# Altium PCB PCB1.PcbDoc
Units mm, origin at the board's own origin, x right, y up, seen from the top; angles counter-clockwise.
Board outline 61 x 30 mm, 2 copper layers (Top Layer, Bottom Layer); 4 components, 2 nets, 12 pads, 146 vias.
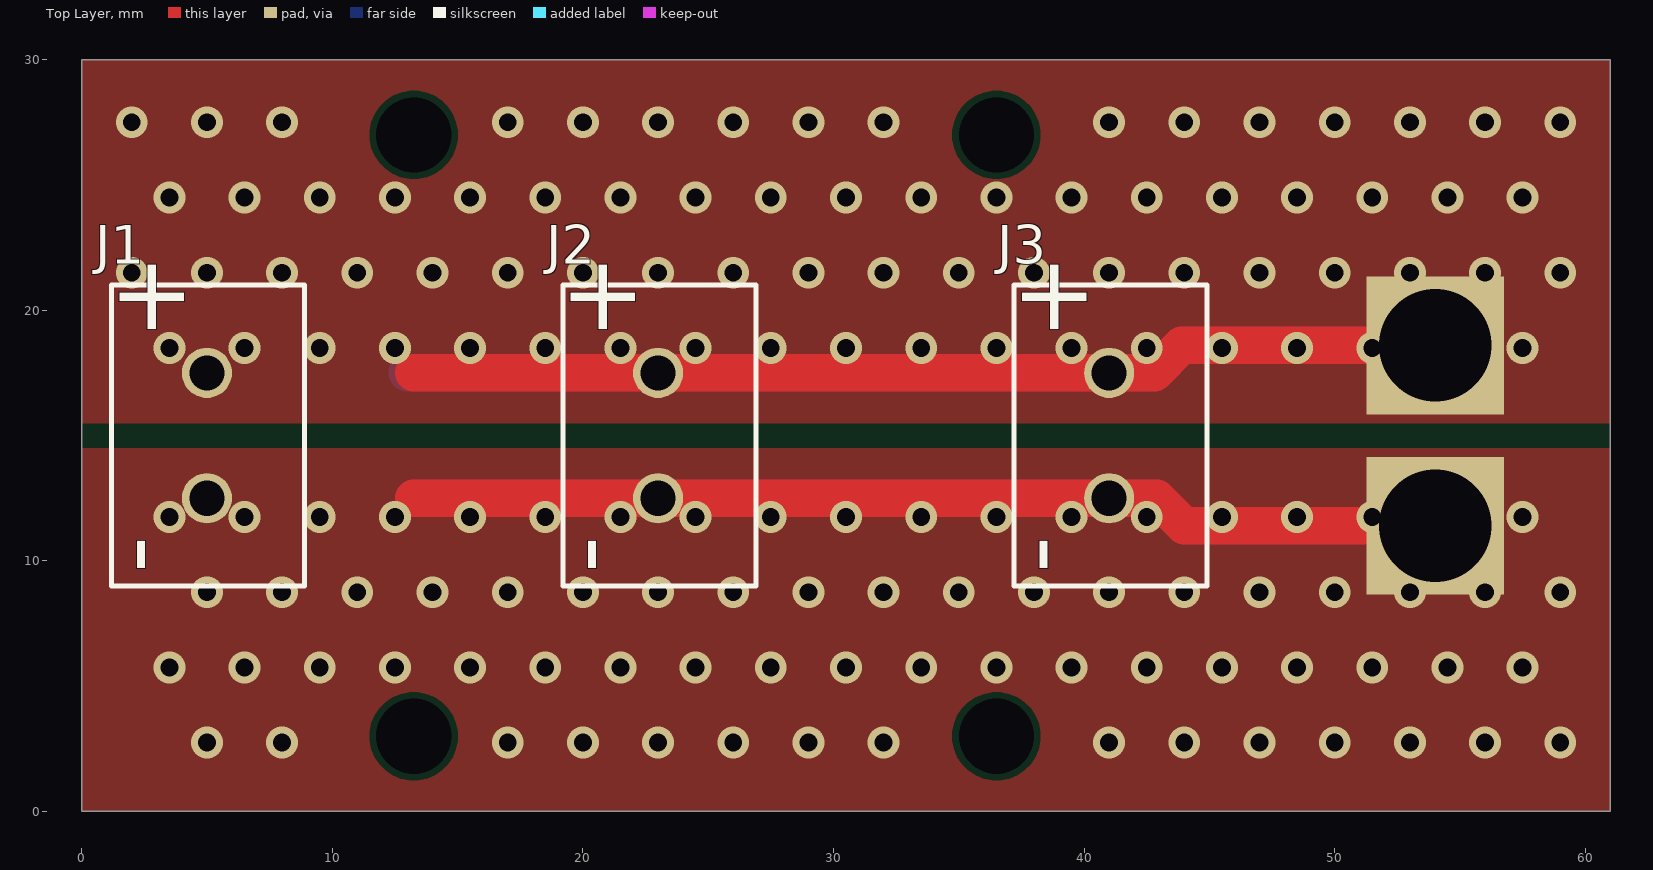
[diagram p0: Top Layer view]
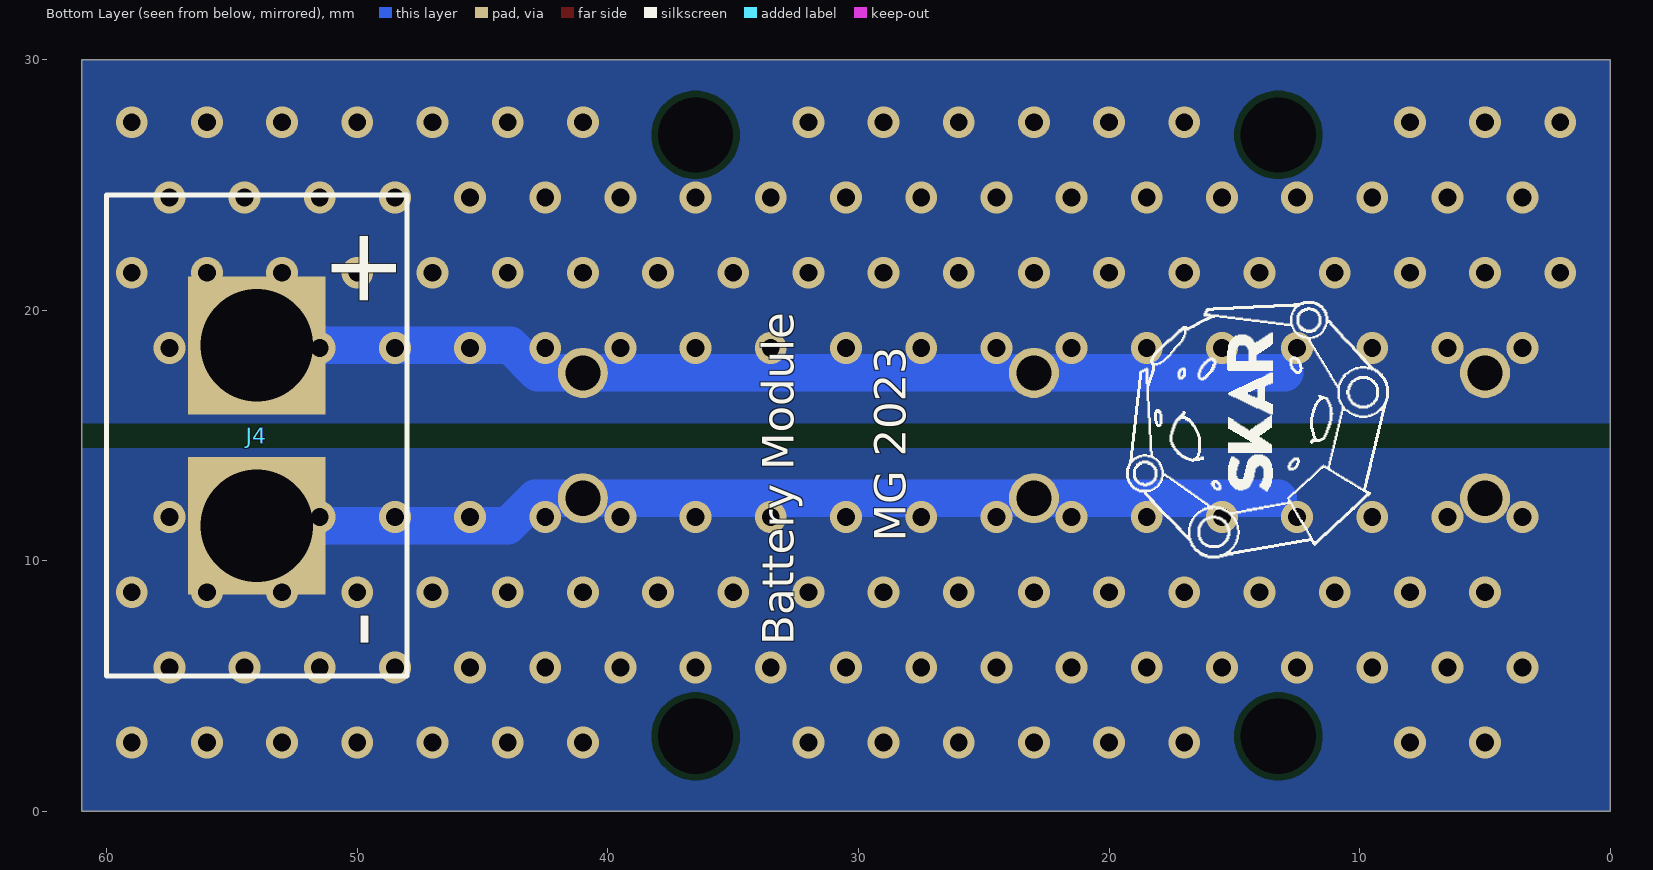
[diagram p1: Bottom Layer view, seen from below]
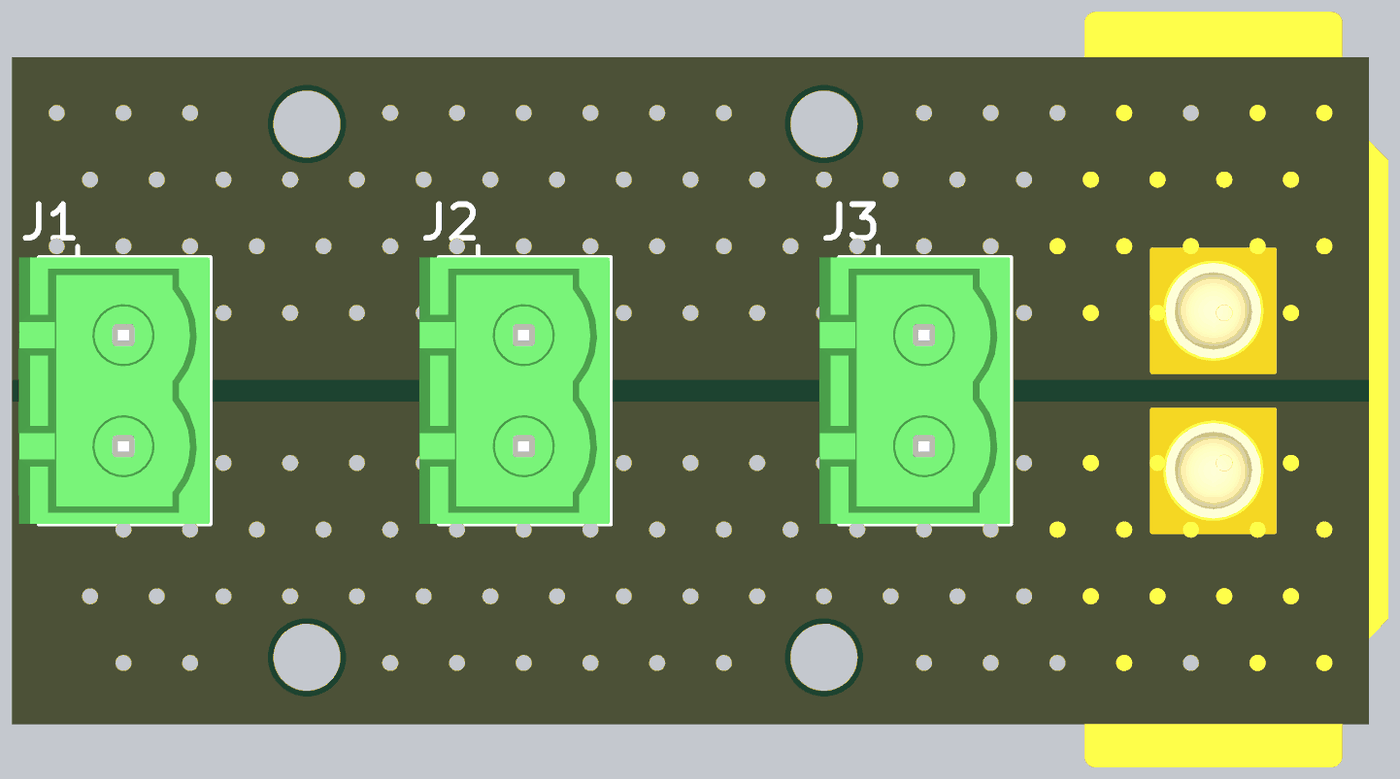
[diagram p2: 3D render of the assembled board from above, using the file's embedded part models]

## Layer stack, top to bottom
Top Solder: solder mask 0.0102, Solder Resist, Dk 3.5
Top Layer: signal copper 0.0356
Dielectric 1: dielectric 0.32, FR-4, Dk 4.8
Bottom Layer: signal copper 0.0356
Bottom Solder: solder mask 0.0102, Solder Resist, Dk 3.5

## Board outline
0,0 0,30 61,30 61,0

## Design rules (kind name [scope] priority, off if disabled: settings)
Clearance [All] p1: gap=0.254 ignorepadtopadclearanceinfootprint=FALSE except(0: Arc-Hole Track-Hole SMDPad-Hole THPad-Hole Via-Hole Fill-Hole Poly-Hole Region-Hole Text-Hole)
PolygonConnect [All] p1: connectstyle=Direct reliefconductorwidth=0.254 reliefentries=4 polygonreliefangle="90 Angle" airgapwidth=0.254
RoutingVias [All] p1: holewidth=0.711 width=1.27 viastyle="Through Hole" minholewidth=0.711 minwidth=1.27 maxholewidth=0.711 maxwidth=1.27
SolderMaskExpansion [All] p1: expansion=0.102 istentingtop=FALSE
Width [All] p1: maxlimit=1.5 minlimit=0.254 preferedwidth=1.5 minimp=50.000000 maximp=50.000000 favimp=50.000000
30 further rules are at their usual default settings.

## Components (designator, comment, footprint, x,y, rotation, side; value= is the part's Value field where it differs from the comment)
J1 "Connector_2" PCBComponent_1 5,17.5 r90 top
J2 "Connector_2" PCBComponent_1 23,17.5 r90 top
J3 "Connector_2" PCBComponent_1 41,17.5 r90 top
J4 "Connector_2" XT60_FEMALE_PANEL 54.012,18.6 r270 bottom

## Footprints (in the part's own frame and the unit in brackets; to place one, negate y for a bottom-side part, rotate by r counter-clockwise, add the part's x,y. Pads: shape width x height; smd on the part's side, far side on the other; paste and mask are expansions set on the pad)
PCBComponent_1 [mm]
  round 2 hole 1.4 paste-2539.97: 1(0,0) 2(-5,0)
  silkscreen extent -8.5,-3.9 3.5,3.8, body extent -8.5,-3.87 3.5,4.7, height 12.1
XT60_FEMALE_PANEL [mm]
  rect 5.5x5.5 hole 4.5 paste-2539.97: 1(0,0) 2(7.2,0)
  silkscreen extent -6,-6 13.2,6, body extent -13.45,-7.88 20.55,7.88, height 15.5

## Free pads (board coordinates)
  round 0 hole 3 paste-2539.97: 5(36.5,27) 6(13.25,27) 7(36.5,3) 8(13.25,3)

## Via types
v1: diameter 1.27, hole 0.711, Top Layer to Bottom Layer, tented both sides, 146 vias

## Nets (pads, with @x,y where several pads share a name; then routed paths per layer and width w, separated by ;. In a path a pad name is that pad's centre, name@x,y a point inside that pad or via, vN(x,y) a via of type N, cw(c..) or ccw(c..) an arc to the next point about the centre after c; other vN are vias at no path point)
+: J1.1 J2.1 J3.1 J4.1 | length 82.7
  Top Layer w1.5: 13.25,17.5 25.25,17.5 36.5,17.5 J3.1 42.8,17.5 43.9,18.6 J4.1@54,18.6
  Bottom Layer w1.5: 13,17.5 25,17.5 J3.1 42.8,17.5 43.9,18.6 J4.1@54,18.6
  other v1: 3.5,18.5 6.5,18.5 9.5,18.5 12.5,18.5 15.5,18.5 18.5,18.5 21.5,18.5 24.5,18.5 27.5,18.5 30.5,18.5 33.5,18.5 36.5,18.5 39.5,18.5 42.5,18.5 45.5,18.5 48.5,18.5 51.5,18.5 54.5,18.5 57.5,18.5 2,21.5 5,21.5 8,21.5 11,21.5 14,21.5 17,21.5 20,21.5 23,21.5 26,21.5 29,21.5 32,21.5 35,21.5 38,21.5 41,21.5 44,21.5 47,21.5 50,21.5 53,21.5 56,21.5 59,21.5 3.5,24.5 6.5,24.5 9.5,24.5 12.5,24.5 15.5,24.5 18.5,24.5 21.5,24.5 24.5,24.5 27.5,24.5 30.5,24.5 33.5,24.5 36.5,24.5 39.5,24.5 42.5,24.5 45.5,24.5 48.5,24.5 51.5,24.5 54.5,24.5 57.5,24.5 2,27.5 5,27.5 8,27.5 17,27.5 20,27.5 23,27.5 26,27.5 29,27.5 32,27.5 41,27.5 44,27.5 47,27.5 50,27.5 53,27.5 56,27.5 59,27.5
-: J1.2 J2.2 J3.2 J4.2 | length 82.4
  Top Layer w1.5: 13.25,12.5 25.25,12.5 36.5,12.5 J3.2 42.9,12.5 44,11.4 J4.2@54,11.4
  Bottom Layer w1.5: 13.25,12.5 25.25,12.5 36.5,12.5 J3.2 42.9,12.5 44,11.4 J4.2@54,11.4
  other v1: 5,2.75 8,2.75 17,2.75 20,2.75 23,2.75 26,2.75 29,2.75 32,2.75 41,2.75 44,2.75 47,2.75 50,2.75 53,2.75 56,2.75 59,2.75 3.5,5.75 6.5,5.75 9.5,5.75 12.5,5.75 15.5,5.75 18.5,5.75 21.5,5.75 24.5,5.75 27.5,5.75 30.5,5.75 33.5,5.75 36.5,5.75 39.5,5.75 42.5,5.75 45.5,5.75 48.5,5.75 51.5,5.75 54.5,5.75 57.5,5.75 5,8.75 8,8.75 11,8.75 14,8.75 17,8.75 20,8.75 23,8.75 26,8.75 29,8.75 32,8.75 35,8.75 38,8.75 41,8.75 44,8.75 47,8.75 50,8.75 53,8.75 56,8.75 59,8.75 3.5,11.75 6.5,11.75 9.5,11.75 12.5,11.75 15.5,11.75 18.5,11.75 21.5,11.75 24.5,11.75 27.5,11.75 30.5,11.75 33.5,11.75 36.5,11.75 39.5,11.75 42.5,11.75 45.5,11.75 48.5,11.75 51.5,11.75 54.5,11.75 57.5,11.75

## Polygon pours and split planes (outlines as drawn)
+ on Top Layer "+_L01_P000" (solid, pour order 0): 0,15.5 0,30 61,30 61,15.5
- on Top Layer "-_L01_P001" (solid, pour order 1): 0,0 0,14.5 61,14.5 61,0
+ on Bottom Layer "+_L02_P003" (solid, pour order 3): 0,15.5 0,30 61,30 61,15.5
- on Bottom Layer "-_L02_P002" (solid, pour order 2): 0,0 0,14.5 61,14.5 61,0

## Silkscreen, mask and mechanical layers (free items; w line width, h text height)
Bottom Overlay:
  drawing of 17 lines, arcs and shapes, not listed
  text "MG 2023" at 28.115,10.768 h1.27 r270
  text "Battery Module" at 32.577,6.642 h1.27 r270
Mechanical 1:
  the board outline again, w0.254

## Text inside footprints (layer, text, board x,y; h text height)
J1: Top Overlay "-" at 3.5,9.5 h3 r90; Top Overlay "+" at 4.1,18.8 h3 r90
J2: Top Overlay "-" at 21.5,9.5 h3 r90; Top Overlay "+" at 22.1,18.8 h3 r90
J3: Top Overlay "-" at 39.5,9.5 h3 r90; Top Overlay "+" at 40.1,18.8 h3 r90
J4: Bottom Overlay "+" at 51.011,23.4 h3 r90; Bottom Overlay "-" at 50.811,8 h3 r90